# Altium PCB display.PcbDoc (part 2 of 2)
Units mil, origin at the board's own origin, x right, y up, seen from the top; angles counter-clockwise.
Board outline 6000 x 4000 mil, 2 copper layers (Top Layer, Bottom Layer); 69 components, 74 nets, 310 pads, 139 vias.
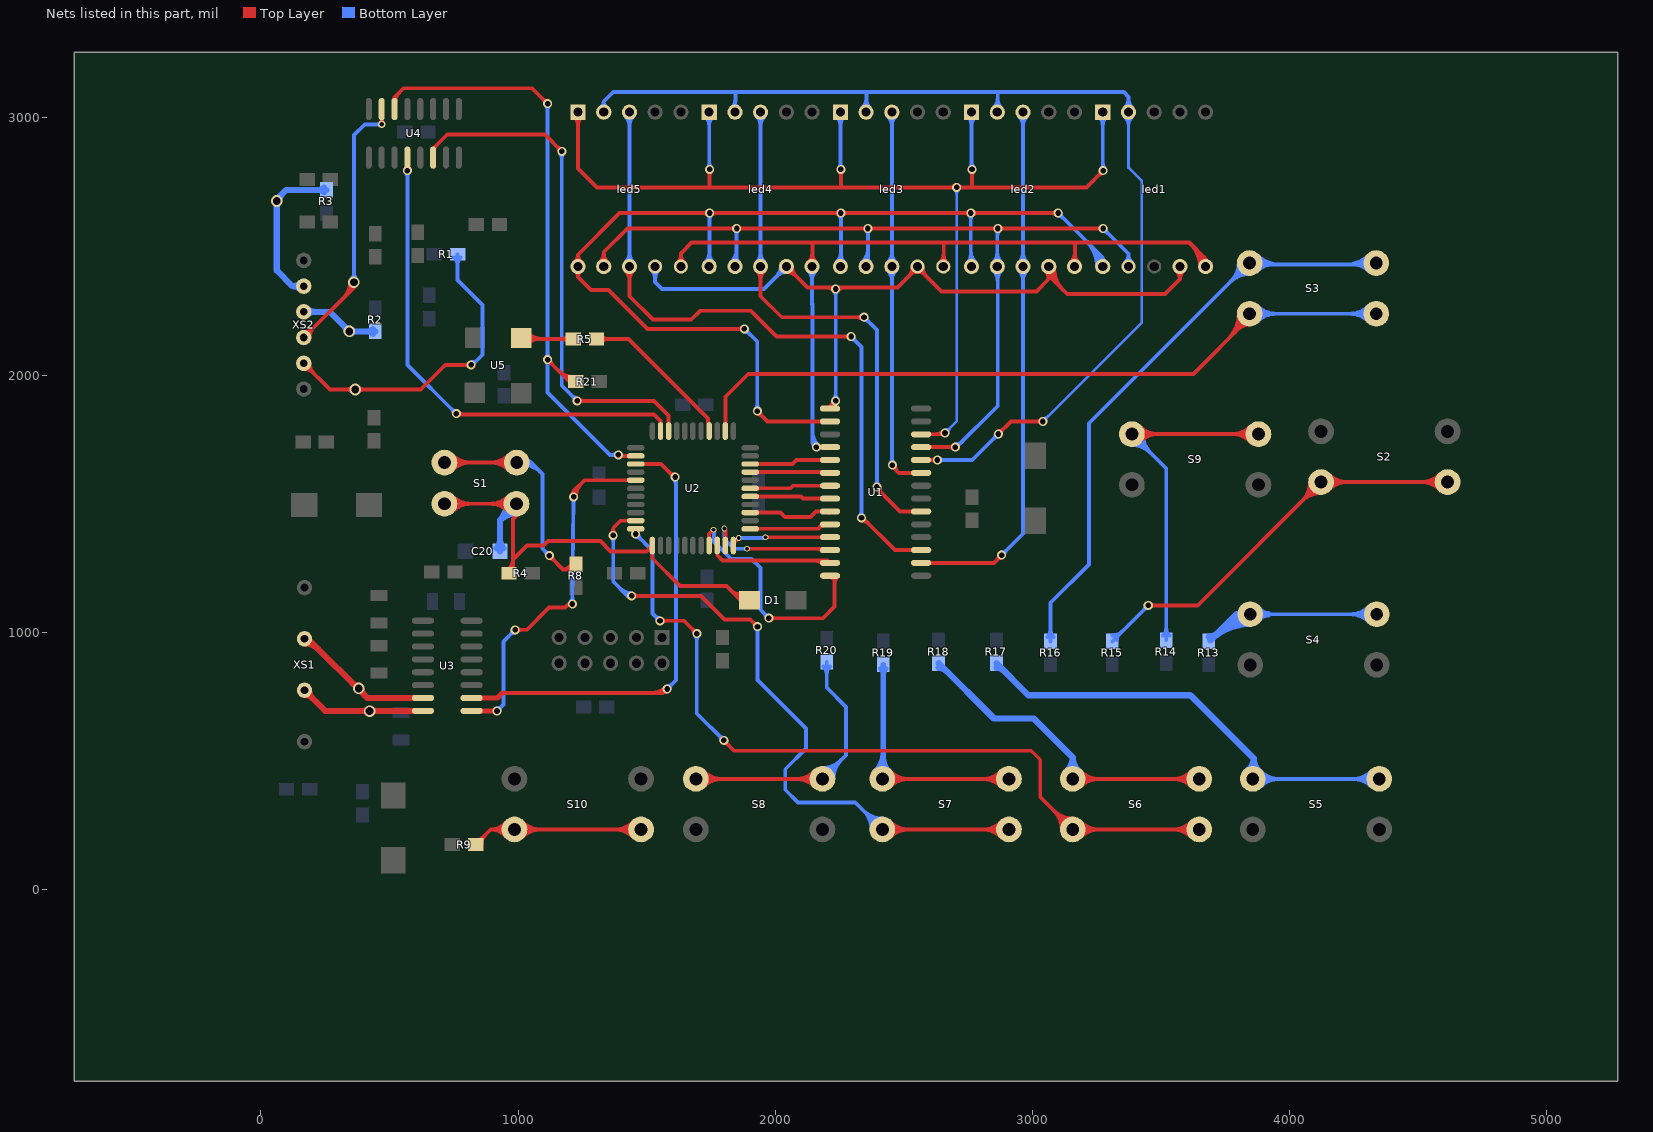
[diagram p2: the nets of this part, all layers, seen from the top]

## Via types
v1: diameter 35, hole 22, Top Layer to Bottom Layer, 110 vias
v2: diameter 22, hole 15, Top Layer to Bottom Layer, 9 vias
v3: diameter 50, hole 28, Top Layer to Bottom Layer, 8 vias
v4: diameter 45, hole 30, Top Layer to Bottom Layer, 6 vias
v5: diameter 157.48, hole 137.8, Top Layer to Bottom Layer, 4 vias
v6: diameter 28, hole 15, Top Layer to Bottom Layer, 1 vias
v7: diameter 30, hole 18, Top Layer to Bottom Layer, 1 vias

## Nets (pads, with @x,y where several pads share a name; then routed paths per layer and width w, separated by ;. In a path a pad name is that pad's centre, name@x,y a point inside that pad or via, vN(x,y) a via of type N, cw(c..) or ccw(c..) an arc to the next point about the centre after c; other vN are vias at no path point) (continued)
Netled1_c: led1.c led2.c led3.c led4.c led5.c U1.1 | length 3971.9
  Top Layer w15: led4.c@2043.15,2400.14 cw(c2043.15,2346.96) 2080.75,2384.56 cw(c2118.36,2422.17) led4.c@2065.18,2422.17 ; led4.c@2043.15,2422.17 2125.32,2340 2475,2340 led3.c@2553.15,2418.15 ; 2198.79,2340 cw(c2198.79,2298.79) v1@2227.93,2327.93 ; U1.1@2212.83,1870 2212.83,1877.83 v1(2235,1900) ; v1@2225,1900 cw(c2200.86,1900) 2217.93,1882.93 cw(c2235,1865.86) v1@2235,1890 ; v1(2235,2335) v1@2235,2340 ; v1@2242.07,2327.93 cw(c2271.21,2298.79) 2271.21,2340 ; 2516.17,2381.17 ccw(c2475.17,2422.17) led3.c@2533.15,2422.17 ; 2525.86,2390.86 cw(c2553.15,2363.58) 2553.15,2402.17 cw(c2553.15,2363.58) 2580.44,2390.86 ; led3.c@2553.15,2422.17 led3.c@2553.15,2418.15 ; led3.c@2573.15,2422.17 ccw(c2631.13,2422.17) 2590.13,2381.17 ; led2.c@3048.52,2405.69 cw(c3019.63,2373.15) 3063.15,2373.15 ; led2.c@3055.2,2422.81 ccw(c3111.22,2418.26) 3071.48,2378.52 ; led2.c@3070.15,2421.6 ccw(c3153.63,2414.81) 3094.41,2355.59 ; led2.c@3077.77,2405.69 ccw(c3106.67,2373.15) 3063.15,2373.15 ; led2.c@3085.1,2420.38 ccw(c3196.05,2411.37) 3117.34,2332.66 ; led1.c@3558.52,2405.69 cw(c3529.63,2373.15) 3573.15,2373.15 ; led1.c@3573.15,2422.17 3573.15,2373.15 ; led1.c@3587.77,2405.69 ccw(c3616.67,2373.15) 3573.15,2373.15 ; led3.c@2553.15,2418.15 2646.3,2325 3015,2325 3063.15,2373.15 ; 3063.15,2373.15 led2.c@3063.15,2422.17 3063.15,2386.85 ; 3063.15,2386.85 cw(c3080.44,2386.85) 3072.84,2402.38 ccw(c3080.44,2386.85) 3063.15,2386.85 ; 3063.15,2386.85 ccw(c3045.86,2386.85) 3053.46,2402.38 cw(c3045.86,2386.85) 3063.15,2386.85 ; 3063.15,2386.85 3135,2315 3515,2315 3573.15,2373.15
  Bottom Layer w15: led5.c@1519.01,2408.02 cw(c1484.87,2373.88) 1533.15,2373.88 cw(c1581.43,2373.88) led5.c@1547.29,2408.02 ; led5.c@1533.15,2422.17 1533.15,2361.85 1560,2335 1955.98,2335 led4.c@2043.15,2422.17 ; led4.c@2021.12,2422.17 cw(c1967.94,2422.17) 2005.55,2384.56 cw(c2043.15,2346.96) led4.c@2043.15,2400.14 ; v1@2227.93,1907.07 ccw(c2210.86,1924.14) 2235,1924.14 ccw(c2259.14,1924.14) v1@2242.07,1907.07 ; v1@2227.93,2327.93 cw(c2210.86,2310.86) 2235,2310.86 cw(c2259.14,2310.86) v1@2242.07,2327.93 ; v1(2235,1900) v1(2235,2335) ; led3.c@2553.15,2408.15 led3.c@2553.15,2422.17
Netled1_d: led1.d led2.d led3.d led4.d led5.d U1.25 | length 4621.8
  Top Layer w15: led5.d@1317.57,2437.74 ccw(c1279.97,2475.34) 1333.15,2475.34 ccw(c1386.33,2475.34) led5.d@1348.73,2437.74 ; led5.d@1333.15,2422.17 1333.15,2478.15 1425,2570 v1(1850,2570) v1(2360,2570) v1(2865,2570) v1(3275,2570) ; v1@1842.93,2562.93 ccw(c1825.86,2545.86) 1825.86,2570 ccw(c1825.86,2594.14) v1@1842.93,2577.07 ; v1@1857.07,2562.93 cw(c1874.14,2545.86) 1874.14,2570 cw(c1874.14,2594.14) v1@1857.07,2577.07 ; v1@2352.93,2562.93 ccw(c2335.86,2545.86) 2335.86,2570 ccw(c2335.86,2594.14) v1@2352.93,2577.07 ; v1@2367.07,2562.93 cw(c2384.14,2545.86) 2384.14,2570 cw(c2384.14,2594.14) v1@2367.07,2577.07 ; U1.25@2567.17,1720 v1(2700,1720) ; v1@2692.93,1712.93 ccw(c2675.86,1695.86) 2675.86,1720 ccw(c2675.86,1744.14) v1@2692.93,1727.07 ; v1@2857.93,2562.93 ccw(c2840.86,2545.86) 2840.86,2570 ccw(c2840.86,2594.14) v1@2857.93,2577.07 ; v1@2872.07,2562.93 cw(c2889.14,2545.86) 2889.14,2570 cw(c2889.14,2594.14) v1@2872.07,2577.07 ; v1@3267.93,2562.93 ccw(c3250.86,2545.86) 3250.86,2570 ccw(c3250.86,2594.14) v1@3267.93,2577.07
  Bottom Layer w15: led4.d@1827.57,2437.74 ccw(c1773.43,2491.88) 1850,2491.88 ; led4.d@1838.18,2427.13 ccw(c1809.65,2455.67) 1850,2455.67 ; v1@1842.93,2562.93 cw(c1825.86,2545.86) 1850,2545.86 cw(c1874.14,2545.86) v1@1857.07,2562.93 ; led4.d@1843.15,2422.17 1850,2429.02 v1(1850,2570) ; 1850,2458.81 ccw(c1879.79,2458.81) led4.d@1858.73,2437.74 ; led3.d@2337.57,2437.74 ccw(c2283.43,2491.88) 2360,2491.88 ; led3.d@2348.18,2427.13 ccw(c2319.65,2455.67) 2360,2455.67 ; v1@2352.93,2562.93 cw(c2335.86,2545.86) 2360,2545.86 cw(c2384.14,2545.86) v1@2367.07,2562.93 ; led3.d@2353.15,2422.17 2360,2429.02 v1(2360,2570) ; 2360,2458.81 ccw(c2389.79,2458.81) led3.d@2368.73,2437.74 ; v1(2700,1720) 2705,1720 2865,1880 2865,2420.31 led2.d@2863.15,2422.17 2863.15,2568.15 v1(2865,2570) ; v1@2700,1730 ccw(c2700,1766.21) 2725.61,1740.61 ; led2.d@2847.57,2406.59 cw(c2805.5,2364.52) 2865,2364.52 ; led2.d@2847.57,2437.74 ccw(c2809.97,2475.34) 2863.15,2475.34 ccw(c2916.33,2475.34) led2.d@2878.73,2437.74 ; v1@2857.93,2562.93 cw(c2845.33,2550.33) 2863.15,2550.33 ; 2863.15,2541.39 cw(c2893.61,2541.39) v1@2872.07,2562.93 ; 2865,2373.45 cw(c2911.86,2373.45) led2.d@2878.73,2406.59 ; v1@3275,2560 cw(c3275,2535.86) 3292.07,2552.93 cw(c3309.14,2570) v1@3285,2570 ; v1(3275,2570) 3373.15,2471.85 led1.d@3373.15,2422.17 ; led1.d@3359.01,2436.31 ccw(c3324.87,2470.45) 3373.15,2470.45 ccw(c3421.43,2470.45) led1.d@3387.29,2436.31
Netled1_DP: led1.DP led2.DP led3.DP led4.DP led5.DP U1.4 | length 3945.9
  Top Layer w15: led5.DP@1619.01,2436.31 ccw(c1584.87,2470.45) 1633.15,2470.45 ccw(c1681.43,2470.45) led5.DP@1647.29,2436.31 ; led5.DP@1633.15,2422.17 1633.15,2473.15 1675,2515 2145,2515 ; led4.DP@2127.57,2437.74 ccw(c2085.5,2479.81) 2145,2479.81 ; led4.DP@2143.15,2422.17 2145,2424.02 2145,2515 ; 2145,2470.88 ccw(c2191.86,2470.88) led4.DP@2158.73,2437.74 ; v1(2160,1720) U1.4@2212.83,1720 ; v1@2167.07,1712.93 cw(c2184.14,1695.86) 2184.14,1720 cw(c2184.14,1744.14) v1@2167.07,1727.07 ; led3.DP@2639.01,2436.31 ccw(c2600.4,2474.92) 2655,2474.92 ; led3.DP@2653.15,2422.17 2655,2424.02 2655,2515 ; 2655,2465.98 ccw(c2696.97,2465.98) led3.DP@2667.29,2436.31 ; led2.DP@3147.57,2437.74 ccw(c3105.5,2479.81) 3165,2479.81 ; led2.DP@3163.15,2422.17 3165,2424.02 3165,2515 ; 3165,2470.88 ccw(c3211.86,2470.88) led2.DP@3178.73,2437.74 ; 3614.56,2510.44 cw(c3526.28,2422.17) led1.DP@3651.12,2422.17 ; 3640.16,2484.84 cw(c3577.49,2422.17) led1.DP@3666.12,2422.17 ; 3665.77,2459.23 cw(c3628.7,2422.17) led1.DP@3681.12,2422.17 ; led1.DP@3673.15,2422.17 3673.15,2451.85 3610,2515 3165,2515 ; 2145,2515 2655,2515 ; 2655,2515 3165,2515
  Bottom Layer w15: led4.DP@2127.57,2406.59 cw(c2089.97,2368.99) 2143.15,2368.99 cw(c2196.33,2368.99) led4.DP@2158.73,2406.59 ; led4.DP@2143.15,2422.17 2143.15,2276.85 2145,2275 2145,1735 v1(2160,1720) ; 2145,1744.14 ccw(c2184.14,1744.14) v1@2156.46,1716.46 ; 2145,1780.36 ccw(c2220.36,1780.36) v1@2167.07,1727.07
Netled1_e: led1.e led2.e led3.e led4.e led5.e U1.2 | length 5518.1
  Top Layer w15: led5.e@1219.35,2439.33 ccw(c1196.17,2468.15) 1233.15,2468.15 ; led5.e@1221.25,2403.63 cw(c1207.27,2381.85) 1233.15,2381.85 ; led5.e@1245.05,2403.63 ccw(c1259.03,2381.85) 1233.15,2381.85 ; led5.e@1246.95,2439.33 cw(c1270.13,2468.15) 1233.15,2468.15 ; v1@1737.93,2622.93 ccw(c1720.86,2605.86) 1720.86,2630 ccw(c1720.86,2654.14) v1@1737.93,2637.07 ; v1@1752.07,2622.93 cw(c1769.14,2605.86) 1769.14,2630 cw(c1769.14,2654.14) v1@1752.07,2637.07 ; v1@1872.93,2172.93 ccw(c1855.86,2155.86) 1855.86,2180 ccw(c1855.86,2204.14) v1@1872.93,2187.07 ; v1(1880,2180) 1503,2180 1351.61,2331.39 1283.61,2331.39 1233.15,2381.85 ; v1@1930,1850 cw(c1930,1825.86) 1947.07,1842.93 cw(c1964.14,1860) v1@1940,1860 ; v1(1930,1860) 1970,1820 2085,1820 ; 2075,1820 2085,1820 ; U1.2@2212.83,1820 2085,1820 ; v1@2247.93,2622.93 ccw(c2230.86,2605.86) 2230.86,2630 ccw(c2230.86,2654.14) v1@2247.93,2637.07 ; v1@2262.07,2622.93 cw(c2279.14,2605.86) 2279.14,2630 cw(c2279.14,2654.14) v1@2262.07,2637.07 ; v1@2752.93,2622.93 ccw(c2735.86,2605.86) 2735.86,2630 ccw(c2735.86,2654.14) v1@2752.93,2637.07 ; v1@2767.07,2622.93 cw(c2784.14,2605.86) 2784.14,2630 cw(c2784.14,2654.14) v1@2767.07,2637.07 ; v1@3092.93,2622.93 ccw(c3075.86,2605.86) 3075.86,2630 ccw(c3075.86,2654.14) v1@3092.93,2637.07 ; v1(3100,2630) v1(2760,2630) v1(2255,2630) v1(1745,2630) 1395,2630 1233.15,2468.15 ; 1233.15,2381.85 led5.e@1233.15,2422.17 1233.15,2468.15
  Bottom Layer w15: led4.e@1727.57,2437.74 ccw(c1685.5,2479.81) 1745,2479.81 ; v1@1737.93,2622.93 cw(c1720.86,2605.86) 1745,2605.86 cw(c1769.14,2605.86) v1@1752.07,2622.93 ; led4.e@1743.15,2422.17 1745,2424.02 v1(1745,2630) ; 1745,2470.88 ccw(c1791.86,2470.88) led4.e@1758.73,2437.74 ; v1@1880,2170 cw(c1880,2145.86) 1897.07,2162.93 cw(c1914.14,2180) v1@1890,2180 ; v1(1880,2180) 1930,2130 v1(1930,1860) ; v1@1922.93,1867.07 ccw(c1905.86,1884.14) 1930,1884.14 ccw(c1954.14,1884.14) v1@1937.07,1867.07 ; led3.e@2237.57,2437.74 ccw(c2195.5,2479.81) 2255,2479.81 ; v1@2247.93,2622.93 cw(c2230.86,2605.86) 2255,2605.86 cw(c2279.14,2605.86) v1@2262.07,2622.93 ; led3.e@2253.15,2422.17 2255,2424.02 v1(2255,2630) ; 2255,2470.88 ccw(c2301.86,2470.88) led3.e@2268.73,2437.74 ; led2.e@2747.57,2437.74 ccw(c2717.57,2467.74) 2760,2467.74 ; v1@2752.93,2622.93 cw(c2735.86,2605.86) 2760,2605.86 cw(c2784.14,2605.86) v1@2767.07,2622.93 ; 2760,2482.95 ccw(c2823.93,2482.95) led2.e@2778.73,2437.74 ; v1(2760,2630) 2760,2425.31 led2.e@2763.15,2422.17 ; v1@3100,2620 cw(c3100,2595.86) 3117.07,2612.93 cw(c3134.14,2630) v1@3110,2630 ; v1(3100,2630) 3273.15,2456.85 ; 3211.02,2518.98 cw(c3114.21,2422.17) led1.e@3251.12,2422.17 ; 3236.63,2493.37 cw(c3165.42,2422.17) led1.e@3266.12,2422.17 ; 3262.23,2467.77 cw(c3216.63,2422.17) led1.e@3281.12,2422.17 ; led1.e@3263.78,2442.1 ccw(c3256.86,2456.85) 3273.15,2456.85 ; led1.e@3273.15,2422.17 3273.15,2456.85 ; led1.e@3282.51,2442.1 cw(c3289.44,2456.85) 3273.15,2456.85
Netled1_f: led1.f led2.f led3.f led4.f led5.f U1.24 | length 5060
  Top Layer w15: U1.24@2567.17,1670 v1(2630,1670) ; v1@2622.93,1662.93 ccw(c2605.86,1645.86) 2605.86,1670 ccw(c2605.86,1694.14) v1@2622.93,1677.07 ; v1(2867,1771) 2916,1820 v1(3040,1820) ; v1@2867,1781 ccw(c2867,1805.14) 2884.07,1788.07 ccw(c2901.14,1771) v1@2877,1771 ; v1@3032.93,1812.93 ccw(c3015.86,1795.86) 3015.86,1820 ccw(c3015.86,1844.14) v1@3032.93,1827.07
  Bottom Layer w10: v1(3040,1820) 3425,2205 3425,2755 3373.15,2806.85 led1.f@3373.15,3022.17 ; v1@3040,1832.5 ccw(c3040,1862.68) 3061.34,1841.34 ccw(c3082.68,1820) v1@3052.5,1820 ; led1.f@3355.81,3004.82 cw(c3313.94,2962.95) 3373.15,2962.95 cw(c3432.36,2962.95) led1.f@3390.49,3004.82 ; led1.f@3362.88,3011.89 cw(c3338.08,2987.09) 3373.15,2987.09 cw(c3408.22,2987.09) led1.f@3383.42,3011.89
  Bottom Layer w15: led5.f@1321,3040.54 ccw(c1306.04,3063.15) 1333.15,3063.15 ; led5.f@1333.15,3022.17 1333.15,3063.15 ; led5.f@1345.3,3040.54 cw(c1360.26,3063.15) 1333.15,3063.15 ; led4.f@1831,3040.54 ccw(c1816.04,3063.15) 1843.15,3063.15 ; led4.f@1843.15,3022.17 1843.15,3063.15 ; led4.f@1855.3,3040.54 cw(c1870.26,3063.15) 1843.15,3063.15 ; led3.f@2337.57,3037.74 ccw(c2295.5,3079.81) 2355,3079.81 ; led3.f@2353.15,3022.17 2355,3024.02 2355,3100 ; 2355,3070.88 ccw(c2401.86,3070.88) led3.f@2368.73,3037.74 ; v1(2630,1670) 2766,1670 v1(2867,1771) ; v1@2637.07,1662.93 cw(c2654.14,1645.86) 2654.14,1670 cw(c2654.14,1694.14) v1@2637.07,1677.07 ; led2.f@2847.57,3037.74 ccw(c2805.5,3079.81) 2865,3079.81 ; v1@2857,1771 cw(c2832.86,1771) 2849.93,1753.93 cw(c2867,1736.86) v1@2867,1761 ; led2.f@2863.15,3022.17 2865,3024.02 2865,3100 ; 2865,3070.88 ccw(c2911.86,3070.88) led2.f@2878.73,3037.74 ; led1.f@3357.57,3037.74 ccw(c3319.97,3075.34) 3373.15,3075.34 ccw(c3426.33,3075.34) led1.f@3388.73,3037.74 ; led1.f@3373.15,3022.17 3373.15,3081.85 3355,3100 2865,3100 ; 1333.15,3063.15 1370,3100 1845,3100 ; 1843.15,3063.15 1845,3065 1845,3100 ; 1845,3100 2355,3100 ; 2355,3100 2865,3100
Netled1_g: led1.g led2.g led3.g led4.g led5.g U1.26 | length 5423
  Top Layer w15: led5.g@1217.57,3006.59 cw(c1179.97,2968.99) 1233.15,2968.99 cw(c1286.33,2968.99) led5.g@1248.73,3006.59 ; led5.g@1233.15,3022.17 1233.15,2803.15 1306.3,2730 1745,2730 ; v1@1737.93,2792.93 cw(c1720.86,2775.86) 1745,2775.86 cw(c1769.14,2775.86) v1@1752.07,2792.93 ; v1(1745,2800) 1745,2730 ; v1@2247.93,2792.93 cw(c2230.86,2775.86) 2255,2775.86 cw(c2279.14,2775.86) v1@2262.07,2792.93 ; v1(2255,2800) 2255,2730 ; U1.26@2567.17,1770 2655,1770 v1(2660,1775) ; 2623.79,1770 ccw(c2623.79,1811.21) v1@2652.93,1782.07 ; v1@2697.93,2722.93 ccw(c2680.86,2705.86) 2680.86,2730 ccw(c2680.86,2754.14) v1@2697.93,2737.07 ; v1@2712.07,2722.93 cw(c2729.14,2705.86) 2729.14,2730 cw(c2729.14,2754.14) v1@2712.07,2737.07 ; v1@2757.93,2792.93 cw(c2740.86,2775.86) 2765,2775.86 cw(c2789.14,2775.86) v1@2772.07,2792.93 ; v1(2765,2800) 2765,2730 ; v1@3265,2795 cw(c3240.86,2795) 3257.93,2777.93 cw(c3275,2760.86) v1@3275,2785 ; v1(3275,2795) 3210,2730 2765,2730 ; 1745,2730 2255,2730 ; 2255,2730 v1(2705,2730) 2765,2730
  Bottom Layer w10: v1(2660,1775) 2705,1820 v1(2705,2730) ; v1@2660,1787.5 ccw(c2660,1817.68) 2681.34,1796.34 ccw(c2702.68,1775) v1@2672.5,1775 ; v1@2696.16,2721.16 cw(c2674.82,2699.82) 2705,2699.82 cw(c2735.18,2699.82) v1@2713.84,2721.16
  Bottom Layer w15: led4.g@1727.57,3006.59 cw(c1689.97,2968.99) 1743.15,2968.99 cw(c1796.33,2968.99) led4.g@1758.73,3006.59 ; v1@1737.93,2807.07 ccw(c1725.33,2819.67) 1743.15,2819.67 ; 1743.15,2828.61 ccw(c1773.61,2828.61) v1@1752.07,2807.07 ; led4.g@1743.15,3022.17 1743.15,2801.85 v1(1745,2800) ; led3.g@2237.57,3006.59 cw(c2199.97,2968.99) 2253.15,2968.99 cw(c2306.33,2968.99) led3.g@2268.73,3006.59 ; v1@2247.93,2807.07 ccw(c2235.33,2819.67) 2253.15,2819.67 ; 2253.15,2828.61 ccw(c2283.61,2828.61) v1@2262.07,2807.07 ; led3.g@2253.15,3022.17 2253.15,2801.85 v1(2255,2800) ; led2.g@2747.57,3006.59 cw(c2709.97,2968.99) 2763.15,2968.99 cw(c2816.33,2968.99) led2.g@2778.73,3006.59 ; v1@2757.93,2807.07 ccw(c2745.33,2819.67) 2763.15,2819.67 ; v1@2760,2795 2763.15,2798.15 led2.g@2763.15,3022.17 ; 2763.15,2828.61 ccw(c2793.61,2828.61) v1@2772.07,2807.07 ; led1.g@3257.57,3006.59 cw(c3219.97,2968.99) 3273.15,2968.99 cw(c3326.33,2968.99) led1.g@3288.73,3006.59 ; v1@3267.93,2802.07 ccw(c3255.33,2814.67) 3273.15,2814.67 ; 3273.15,2823.61 ccw(c3303.61,2823.61) v1@3282.07,2802.07 ; led1.g@3273.15,3022.17 3273.15,2796.85 v1(3275,2795)
Netled2_AT: led2.AT U1.16 | length 2408.3
  Top Layer w15: U1.16@2567.17,1270 2850,1270 v1(2880,1300) ; v1@2870,1300 cw(c2845.86,1300) 2862.93,1282.93 cw(c2880,1265.86) v1@2880,1290
  Bottom Layer w15: v1(2880,1300) 2963.15,1383.15 led2.AT@2963.15,2422.17 led2.AT@2963.15,3022.17 ; v1@2880,1310 ccw(c2880,1334.14) 2897.07,1317.07 ccw(c2914.14,1300) v1@2890,1300 ; led2.AT@2947.57,2406.59 cw(c2909.97,2368.99) 2963.15,2368.99 cw(c3016.33,2368.99) led2.AT@2978.73,2406.59 ; led2.AT@2947.57,2437.74 ccw(c2909.97,2475.34) 2963.15,2475.34 ccw(c3016.33,2475.34) led2.AT@2978.73,2437.74 ; led2.AT@2947.57,3006.59 cw(c2909.97,2968.99) 2963.15,2968.99 cw(c3016.33,2968.99) led2.AT@2978.73,3006.59
Netled3_AT: led3.AT U1.23 | length 1815
  Top Layer w15: v1@2453.15,1646.85 2480,1620 U1.23@2567.17,1620 ; v1@2465,1650 ccw(c2501.21,1650) 2475.61,1624.39
  Bottom Layer w15: led3.AT@2437.57,2406.59 cw(c2399.97,2368.99) 2453.15,2368.99 cw(c2506.33,2368.99) led3.AT@2468.73,2406.59 ; led3.AT@2437.57,2437.74 ccw(c2399.97,2475.34) 2453.15,2475.34 ccw(c2506.33,2475.34) led3.AT@2468.73,2437.74 ; led3.AT@2437.57,3006.59 cw(c2399.97,2968.99) 2453.15,2968.99 cw(c2506.33,2968.99) led3.AT@2468.73,3006.59 ; v1@2447.93,1657.07 ccw(c2435.33,1669.67) 2453.15,1669.67 ; 2453.15,1678.61 ccw(c2483.61,1678.61) v1@2462.07,1657.07 ; led3.AT@2453.15,3022.17 led3.AT@2453.15,2422.17 2453.15,1651.85 v1(2455,1650)
Netled4_AT: led4.AT U1.20 | length 2439
  Top Layer w15: led4.AT@1927.57,2406.59 cw(c1889.97,2368.99) 1943.15,2368.99 cw(c1996.33,2368.99) led4.AT@1958.73,2406.59 ; led4.AT@1943.15,2422.17 1943.15,2306.85 2025,2225 v1(2345,2225) ; v1@2337.93,2217.93 ccw(c2320.86,2200.86) 2320.86,2225 ccw(c2320.86,2249.14) v1@2337.93,2232.07 ; v1(2395,1565) 2405,1555 2405,1550 2485,1470 U1.20@2567.17,1470 ; v1@2405,1565 ccw(c2441.21,1565) 2415.61,1539.39
  Bottom Layer w15: led4.AT@1927.57,2437.74 ccw(c1889.97,2475.34) 1943.15,2475.34 ccw(c1996.33,2475.34) led4.AT@1958.73,2437.74 ; led4.AT@1927.57,3006.59 cw(c1889.97,2968.99) 1943.15,2968.99 cw(c1996.33,2968.99) led4.AT@1958.73,3006.59 ; led4.AT@1943.15,2422.17 led4.AT@1943.15,3022.17 ; v1@2345,2215 cw(c2345,2190.86) 2362.07,2207.93 cw(c2379.14,2225) v1@2355,2225 ; v1(2345,2225) 2395,2175 v1(2395,1565) ; v1@2387.93,1572.07 ccw(c2370.86,1589.14) 2395,1589.14 ccw(c2419.14,1589.14) v1@2402.07,1572.07
Netled5_AT: led5.AT U1.17 | length 3063.6
  Top Layer w15: led5.AT@1417.57,2406.59 cw(c1379.97,2368.99) 1433.15,2368.99 cw(c1486.33,2368.99) led5.AT@1448.73,2406.59 ; led5.AT@1433.15,2422.17 1433.15,2306.85 1524,2216 1673.5,2216 1707.5,2250 1905,2250 2005,2150 v1(2295,2150) ; v1@2287.93,2142.93 ccw(c2270.86,2125.86) 2270.86,2150 ccw(c2270.86,2174.14) v1@2287.93,2157.07 ; v1@2335,1435 cw(c2335,1398.79) 2360.61,1424.39 ; v1@2340,1445 2465,1320 U1.17@2567.17,1320
  Bottom Layer w15: led5.AT@1417.57,2437.74 ccw(c1379.97,2475.34) 1433.15,2475.34 ccw(c1486.33,2475.34) led5.AT@1448.73,2437.74 ; led5.AT@1417.57,3006.59 cw(c1379.97,2968.99) 1433.15,2968.99 cw(c1486.33,2968.99) led5.AT@1448.73,3006.59 ; led5.AT@1433.15,2422.17 led5.AT@1433.15,3022.17 ; v1@2295,2140 cw(c2295,2115.86) 2312.07,2132.93 cw(c2329.14,2150) v1@2305,2150 ; v1(2295,2150) 2335,2110 v1(2335,1445) ; v1@2327.93,1452.07 ccw(c2310.86,1469.14) 2335,1469.14 ccw(c2359.14,1469.14) v1@2342.07,1452.07
NetR1_2: R1.2 XS2.2 | length 1570.7
  Top Layer w15: XS2.2@167,2023.5 cw(c167,1969.18) 205.41,2007.59 cw(c243.82,2046) XS2.2@189.5,2046 ; XS2.2@167,2046 XS2.2@171,2042 ; XS2.2@179,2034 XS2.2@171,2042 ; v4@356.39,1933.39 ccw(c330.79,1907.79) 330.79,1944 ccw(c330.79,1980.21) v4@356.39,1954.61 ; v4@377.61,1933.39 cw(c403.21,1907.79) 403.21,1944 cw(c403.21,1980.21) v4@377.61,1954.61 ; 791.44,2039 ccw(c791.44,2066.56) v1@810.93,2047.07 ; 796.27,2039 cw(c796.27,2018.27) v1@810.93,2032.93 ; v1@812,2034 v1@817,2039 ; v1(818,2040) v1@817,2039 ; XS2.2@171,2042 269,1944 622,1944 717,2039 v1@817,2039
  Bottom Layer w15: R1.2@752.63,2457.63 cw(c722.75,2427.75) 765,2427.75 cw(c807.25,2427.75) R1.2@777.37,2457.63 ; R1.2@765,2469 765,2370 862,2273 862,2079 v1@821.5,2038.5 ; v1@818,2050 ccw(c818,2086.21) 843.61,2060.61
  other v4: 367,1944
NetR2_2: R2.2 XS2.4 | length 509.5
  Bottom Layer w23.62: XS2.4@167,2246 268,2246 v4(344,2170) R2.2@445,2170 ; XS2.4@179.86,2233.14 cw(c210.91,2202.09) 210.91,2246 cw(c210.91,2289.91) XS2.4@179.86,2258.86 ; v4@333.31,2170 ccw(c307.51,2170) 325.75,2188.25 ccw(c344,2206.49) v4@344,2180.69 ; v4@351.56,2162.44 cw(c369.81,2144.19) 369.81,2170 cw(c369.81,2195.81) v4@351.56,2177.56 ; R2.2@435.67,2160.67 ccw(c413.16,2138.16) 413.16,2170 ccw(c413.16,2201.84) R2.2@435.67,2179.33
NetR3_2: R3.2 XS2.5 | length 805.8
  Bottom Layer w23.62: v4@54.44,2669.44 cw(c36.19,2651.19) 62,2651.19 cw(c87.81,2651.19) v4@69.56,2669.44 ; v4@72.69,2677 cw(c112.98,2677) 84.49,2705.49 ; XS2.5@154.14,2333.14 ccw(c123.09,2302.09) 123.09,2346 ccw(c123.09,2389.91) XS2.5@154.14,2358.86 ; XS2.5@167,2346 123,2346 62,2407 62,2683 99,2720 R3.2@255,2720 ; R3.2@245.67,2710.67 ccw(c223.16,2688.16) 223.16,2720 ccw(c223.16,2751.84) R3.2@245.67,2729.33
  other v4: 62,2677
NetR5_1: R5.1 U2.37 | length 704.1
  Top Layer w15: R5.1@1305,2140 1430,2140 1738,1832 1738,1817 1742.99,1812.01 U2.37@1742.99,1782.44 U2.37@1742.99,1808.01 ; R5.1@1322.37,2127.63 cw(c1352.25,2097.75) 1352.25,2140 cw(c1352.25,2182.25) R5.1@1322.37,2152.37
NetR5_2: R5.2 U5.3 | length 433.6
  Top Layer w15: U5.3@1013,2144 1017,2140 R5.2@1215,2140 ; U5.3@1024.93,2155.93 ccw(c1063.38,2194.38) 1063.38,2140 ; U5.3@1035.54,2121.46 cw(c1080.28,2076.72) 1080.28,2140 ; U5.3@1035.54,2166.54 ccw(c1099.6,2230.6) 1099.6,2140 ; R5.2@1197.63,2127.63 ccw(c1167.75,2097.75) 1167.75,2140 ccw(c1167.75,2182.25) R5.2@1197.63,2152.37
NetR8_1: R8.1 S1.2 | length 1821
  Top Layer w15: S1.2@714,1660 S1.2@995,1660 ; S1.2@733.45,1640.55 cw(c780.39,1593.61) 780.39,1660 cw(c780.39,1726.39) S1.2@733.45,1679.45 ; S1.2@744.05,1629.95 cw(c816.6,1557.4) 816.6,1660 cw(c816.6,1762.6) S1.2@744.05,1690.05 ; S1.2@964.95,1629.95 ccw(c892.4,1557.4) 892.4,1660 ccw(c892.4,1762.6) S1.2@964.95,1690.05 ; S1.2@975.55,1640.55 ccw(c928.61,1593.61) 928.61,1660 ccw(c928.61,1726.39) S1.2@975.55,1679.45 ; v1@1121.9,1288.1 cw(c1121.9,1263.96) 1138.97,1281.03 cw(c1156.04,1298.1) v1@1131.9,1298.1 ; v1@1123.46,1296.54 1175,1245 ; 1198.08,1245 ccw(c1198.08,1271.96) R8.1@1222.72,1261.01 ; R8.1@1209.01,1267.1 cw(c1175,1282.21) 1175,1245 ; R8.1@1240,1245 1175,1245
  Bottom Layer w15: S1.2@990.52,1676.92 cw(c1006.01,1618.45) 1048.78,1661.22 ; S1.2@994.36,1662.42 cw(c1013.73,1589.32) 1067.21,1642.79 ; S1.2@995,1660 1050,1660 ; S1.2@998.2,1647.92 cw(c1021.46,1560.18) 1085.64,1624.36 ; S1.2@1036.13,1649.28 cw(c1050,1645.66) 1050,1660 ; S1.2@1036.13,1670.72 ccw(c1050,1674.34) 1050,1660 ; v1@1111.9,1298.1 ccw(c1087.75,1298.1) 1104.83,1315.17 ccw(c1121.9,1332.25) v1@1121.9,1308.1 ; v1(1121.9,1298.1) 1095,1325 1095,1615 1050,1660
NetR9_2: R9.2 S10.1 | length 1490.4
  Top Layer w15: R9.2@835,175 893.74,233.74 ; R9.2@840,192.5 ccw(c840,222.68) 861.34,201.34 ; R9.2@857.5,175 cw(c911.82,175) 873.41,213.41 ; S10.1@954.02,206.05 ccw(c893.75,154.3) 893.75,233.74 ; S10.1@954.02,261.43 cw(c893.75,313.18) 893.75,233.74 ; S10.1@965.4,215.82 ccw(c926.4,182.34) 926.4,233.74 ccw(c926.4,285.14) S10.1@965.4,251.66 ; S10.1@1005.71,214.29 cw(c1052.65,167.35) 1052.65,233.74 cw(c1052.65,300.13) S10.1@1005.71,253.19 ; S10.1@1016.31,203.69 cw(c1088.86,131.14) 1088.86,233.74 cw(c1088.86,336.34) S10.1@1016.31,263.79 ; S10.1@1448.33,203.69 ccw(c1375.78,131.14) 1375.78,233.74 ccw(c1375.78,336.34) S10.1@1448.33,263.79 ; S10.1@1458.94,214.29 ccw(c1411.99,167.35) 1411.99,233.74 ccw(c1411.99,300.13) S10.1@1458.94,253.19 ; S10.1@1478.39,233.74 S10.1@986.26,233.74 893.74,233.74
NetR13_1: R13.1 S4.2 | length 1456
  Bottom Layer w15: 3916.26,1070.59 S4.2@4338.26,1070.59 ; S4.2@4308.21,1040.54 ccw(c4235.66,967.99) 4235.66,1070.59 ccw(c4235.66,1173.19) S4.2@4308.21,1100.64 ; S4.2@4318.81,1051.15 ccw(c4271.87,1004.2) 4271.87,1070.59 ccw(c4271.87,1136.98) S4.2@4318.81,1090.04
  Bottom Layer w25: R13.1@3685,982.5 ccw(c3685,1030.57) 3718.99,996.58 ; R13.1@3691.32,968.91 cw(c3846.26,813.98) S4.2@3846.26,1033.09 ; R13.1@3692.7,970.3 3793,1070.59 3916.26,1070.59 ; 3734,1011.59 cw(c3846.26,899.33) S4.2@3846.26,1058.09 ; 3776.68,1054.27 cw(c3846.26,984.69) S4.2@3846.26,1083.09 ; S4.2@3877.48,1049.82 cw(c3916.26,1024.01) 3916.26,1070.59 ; S4.2@3877.48,1091.37 ccw(c3916.26,1117.17) 3916.26,1070.59
NetR14_1: R14.1 S9.2 | length 2210.7
  Top Layer w15: S9.2@3386.26,1770.59 S9.2@3878.26,1770.59 ; S9.2@3405.71,1751.15 cw(c3452.65,1704.2) 3452.65,1770.59 cw(c3452.65,1836.98) S9.2@3405.71,1790.04 ; S9.2@3416.31,1740.54 cw(c3488.86,1667.99) 3488.86,1770.59 cw(c3488.86,1873.19) S9.2@3416.31,1800.64 ; S9.2@3848.21,1740.54 ccw(c3775.66,1667.99) 3775.66,1770.59 ccw(c3775.66,1873.19) S9.2@3848.21,1800.64 ; S9.2@3858.81,1751.15 ccw(c3811.87,1704.2) 3811.87,1770.59 ccw(c3811.87,1836.98) S9.2@3858.81,1790.04
  Bottom Layer w15: S9.2@3386.26,1728.09 cw(c3386.26,1625.49) 3458.81,1698.04 cw(c3531.36,1770.59) S9.2@3428.76,1770.59 ; S9.2@3386.26,1743.09 cw(c3386.26,1676.7) 3433.21,1723.65 cw(c3480.15,1770.59) S9.2@3413.76,1770.59 ; S9.2@3386.26,1770.59 3520,1636.85 R14.1@3520,970 ; R14.1@3507.63,987.37 ccw(c3477.75,1017.25) 3520,1017.25 ccw(c3562.25,1017.25) R14.1@3532.37,987.37
NetR15_1: R15.1 S2.2 | length 2498.9
  Top Layer w15: v1(3450,1105) 3642.33,1105 S2.2@4121.74,1584.41 S2.2@4613.74,1584.41 ; v1@3457.07,1097.93 cw(c3474.14,1080.86) 3474.14,1105 cw(c3474.14,1129.14) v1@3457.07,1112.07 ; S2.2@4079.24,1584.41 cw(c3976.64,1584.41) 4049.19,1511.86 cw(c4121.74,1439.31) S2.2@4121.74,1541.91 ; S2.2@4094.24,1584.41 cw(c4027.85,1584.41) 4074.79,1537.46 cw(c4121.74,1490.52) S2.2@4121.74,1556.91 ; S2.2@4141.19,1564.96 cw(c4188.13,1518.02) 4188.13,1584.41 cw(c4188.13,1650.8) S2.2@4141.19,1603.85 ; S2.2@4151.79,1554.36 cw(c4224.34,1481.81) 4224.34,1584.41 cw(c4224.34,1687.01) S2.2@4151.79,1614.46 ; S2.2@4583.69,1554.36 ccw(c4511.14,1481.81) 4511.14,1584.41 ccw(c4511.14,1687.01) S2.2@4583.69,1614.46 ; S2.2@4594.29,1564.96 ccw(c4547.35,1518.02) 4547.35,1584.41 ccw(c4547.35,1650.8) S2.2@4594.29,1603.85
  Bottom Layer w15: R15.1@3310,965 v1(3450,1105) ; R15.1@3310,987.5 ccw(c3310,1041.82) 3348.41,1003.41 ; R15.1@3327.5,970 cw(c3357.68,970) 3336.34,991.34 ; v1@3440,1105 cw(c3415.86,1105) 3432.93,1087.93 cw(c3450,1070.86) v1@3450,1095
NetR16_1: R16.1 S3.2 | length 3145.5
  Bottom Layer w15: R16.1@3057.63,982.37 ccw(c3027.75,1012.25) 3070,1012.25 ccw(c3112.25,1012.25) R16.1@3082.37,982.37 ; R16.1@3070,965 3070,1115 3219,1264 3219,1813 3836.59,2430.59 S3.2@4336.26,2430.59 ; 3767.15,2361.15 cw(c3844.26,2284.04) S3.2@3844.26,2393.09 ; 3773.6,2367.6 ccw(c3705.6,2435.59) S3.2@3801.76,2435.59 ; 3792.76,2386.76 cw(c3844.26,2335.26) S3.2@3844.26,2408.09 ; 3799.2,2393.2 ccw(c3756.81,2435.59) S3.2@3816.76,2435.59 ; S3.2@3863.71,2416.15 cw(c3898.58,2381.27) 3898.58,2430.59 ; S3.2@3863.71,2455.04 ccw(c3922.72,2514.05) 3922.72,2430.59 ; S3.2@3874.31,2405.54 cw(c3934.79,2345.06) 3934.79,2430.59 ; S3.2@3874.31,2465.64 ccw(c3958.93,2550.27) 3958.93,2430.59 ; 4221.58,2430.59 ccw(c4221.58,2550.27) S3.2@4306.21,2465.64 ; 4245.73,2430.59 cw(c4245.73,2345.06) S3.2@4306.21,2405.54 ; 4257.8,2430.59 ccw(c4257.8,2514.05) S3.2@4316.81,2455.04 ; 4281.94,2430.59 cw(c4281.94,2381.27) S3.2@4316.81,2416.15
NetR17_1: R17.1 S5.2 | length 2388.3
  Bottom Layer w15: S5.2@3860,430.59 S5.2@4336,430.59 ; S5.2@3875.71,411.15 cw(c3922.65,364.2) 3922.65,430.59 cw(c3922.65,496.98) S5.2@3875.71,450.04 ; S5.2@3886.31,400.54 cw(c3958.86,327.99) 3958.86,430.59 cw(c3958.86,533.19) S5.2@3886.31,460.64 ; S5.2@4318.21,400.54 ccw(c4245.66,327.99) 4245.66,430.59 ccw(c4245.66,533.19) S5.2@4318.21,460.64 ; S5.2@4328.81,411.15 ccw(c4281.87,364.2) 4281.87,430.59 ccw(c4281.87,496.98) S5.2@4328.81,450.04
  Bottom Layer w25: R17.1@2860,862.5 cw(c2860,820.25) 2889.87,850.13 ; R17.1@2860,880 2984,756 3614,756 3860,510 ; S5.2@3834.69,461.27 ccw(c3800.43,510) 3860,510 ; S5.2@3860,430.59 3860,510 ; S5.2@3882.28,457.6 cw(c3932.76,510) 3860,510
NetR18_1: R18.1 S6.2 | length 1936.7
  Top Layer w15: S6.2@3156.26,430.59 S6.2@3648.26,430.59 ; S6.2@3175.71,411.15 cw(c3222.65,364.2) 3222.65,430.59 cw(c3222.65,496.98) S6.2@3175.71,450.04 ; S6.2@3186.31,400.54 cw(c3258.86,327.99) 3258.86,430.59 cw(c3258.86,533.19) S6.2@3186.31,460.64 ; S6.2@3618.21,400.54 ccw(c3545.66,327.99) 3545.66,430.59 ccw(c3545.66,533.19) S6.2@3618.21,460.64 ; S6.2@3628.81,411.15 ccw(c3581.87,364.2) 3581.87,430.59 ccw(c3581.87,496.98) S6.2@3628.81,450.04
  Bottom Layer w25: R18.1@2635,862.5 cw(c2635,820.25) 2664.87,850.13 ; R18.1@2635,880 2850,665 3005,665 3156.26,513.74 ; S6.2@3131.44,458.7 ccw(c3082.83,513.74) 3156.26,513.74 ; S6.2@3156.26,430.59 3156.26,513.74 ; S6.2@3181.08,458.7 cw(c3229.69,513.74) 3156.26,513.74
NetR19_1: R19.1 S7.2 | length 1720.1
  Top Layer w15: S7.2@2416.26,430.59 S7.2@2908.26,430.59 ; S7.2@2435.71,411.15 cw(c2482.65,364.2) 2482.65,430.59 cw(c2482.65,496.98) S7.2@2435.71,450.04 ; S7.2@2446.31,400.54 cw(c2518.86,327.99) 2518.86,430.59 cw(c2518.86,533.19) S7.2@2446.31,460.64 ; S7.2@2878.21,400.54 ccw(c2805.66,327.99) 2805.66,430.59 ccw(c2805.66,533.19) S7.2@2878.21,460.64 ; S7.2@2888.81,411.15 ccw(c2841.87,364.2) 2841.87,430.59 ccw(c2841.87,496.98) S7.2@2888.81,450.04
  Bottom Layer w20: S7.2@2387.98,458.87 ccw(c2310.66,536.19) 2420,536.19 ; S7.2@2402.12,444.73 ccw(c2358.95,487.9) 2420,487.9 ; R19.1@2409.39,859.39 cw(c2383.79,833.79) 2420,833.79 cw(c2456.21,833.79) R19.1@2430.61,859.39 ; S7.2@2420,434.33 R19.1@2420,875 ; 2420,518.13 ccw(c2503.8,518.13) S7.2@2444.54,458.87
NetR20_1: R20.1 S8.2 | length 1878.2
  Top Layer w15: S8.2@1691.26,430.59 S8.2@2183.26,430.59 ; S8.2@1710.71,411.15 cw(c1757.65,364.2) 1757.65,430.59 cw(c1757.65,496.98) S8.2@1710.71,450.04 ; S8.2@1721.31,400.54 cw(c1793.86,327.99) 1793.86,430.59 cw(c1793.86,533.19) S8.2@1721.31,460.64 ; S8.2@2153.21,400.54 ccw(c2080.66,327.99) 2080.66,430.59 ccw(c2080.66,533.19) S8.2@2153.21,460.64 ; S8.2@2163.81,411.15 ccw(c2116.87,364.2) 2116.87,430.59 ccw(c2116.87,496.98) S8.2@2163.81,450.04
  Bottom Layer w15: S8.2@2183.26,430.59 2275,522.33 2275,710 2200,785 R20.1@2200,885 ; S8.2@2183.26,458.09 ccw(c2183.26,524.48) 2230.21,477.54 ccw(c2277.15,430.59) S8.2@2210.76,430.59 ; S8.2@2183.26,473.09 ccw(c2183.26,575.69) 2255.81,503.14 ccw(c2328.36,430.59) S8.2@2225.76,430.59 ; R20.1@2187.63,867.63 cw(c2157.75,837.75) 2200,837.75 cw(c2242.25,837.75) R20.1@2212.37,867.63
NetU1_5: U1.5 U2.31 | length 316.8
  Top Layer w15: U2.31@1902.44,1654.49 2013,1654.49 2066.49,1654.49 2082,1670 U1.5@2212.83,1670
NetU1_6: U1.6 U2.30 | length 323.6
  Top Layer w15: U2.30@1902.44,1622.99 U1.6@2209.84,1622.99 ; 2167.64,1622.99 cw(c2167.64,1602.37) U1.6@2182.23,1616.95
NetU1_7: U1.7 U2.28 | length 314.5
  Top Layer w15: U2.28@1902.44,1560 2059,1560 2069,1570 U1.7@2212.83,1570
NetU1_8: U1.8 U2.27 | length 313.9
  Top Layer w15: U2.27@1902.44,1528.5 2099.5,1528.5 2108,1520 U1.8@2212.83,1520
NetU1_9: U1.9 U2.25 | length 323.3
  Top Layer w15: U2.25@1902.44,1465.51 2020.49,1465.51 2037,1449 2137,1449 2158,1470 U1.9@2203.86,1470 ; U1.9@2208.35,1465.51 U1.9@2212.83,1470
NetU1_10: U1.10 U2.23 | length 330.1
  Top Layer w15: U2.23@1902.44,1402.52 2165.52,1402.52 2183,1420 U1.10@2212.83,1420 ; 2174.03,1411.03 cw(c2185.28,1399.79) U1.10@2185.28,1415.69
NetU1_11: U1.11 U2.22 | length 403.5
  Top Layer w15: U2.22@1837.48,1337.56 1837.48,1346.48 v2(1858,1367) ; v2(1962,1370) U1.11@2212.83,1370
  Bottom Layer w15: v2(1858,1367) v2@1958,1367 ; 1946.31,1367 ccw(c1946.31,1385.69) v2@1959.53,1372.47
NetU1_12: U1.12 U2.21 | length 578.2
  Top Layer w15: v2@1799.53,1401.53 cw(c1783.93,1385.93) 1805.98,1385.93 ; v2@1803,1404 v2(1802,1404) 1805.98,1400.02 U2.21@1805.98,1337.56 ; v2(1890,1325) 2207.83,1325 U1.12@2212.83,1320 ; 2162.8,1325 cw(c2162.8,1297.52) U1.12@2182.23,1316.95
  Bottom Layer w15: v2(1802,1404) 1802,1362 1839,1325 v2(1890,1325)
NetU1_13: U1.13 U2.20 | length 523
  Top Layer w15: U2.20@1774.49,1337.56 1774.49,1300.51 1795,1280 2202.83,1280 U1.13@2212.83,1270 ; 2150.73,1280 cw(c2150.73,1235.45) U1.13@2182.23,1266.95
NetU1_14: U1.14 U2.19 | length 1092.8
  Top Layer w15: U2.19@1742.99,1337.56 1742.99,1381.99 v2(1760,1399) ; v1(1975,1055) 2185,1055 2230,1100 2230,1202.83 U1.14@2212.83,1220 ; v1@1982.07,1047.93 cw(c1999.14,1030.86) 1999.14,1055 cw(c1999.14,1079.14) v1@1982.07,1062.07 ; 2230,1184.5 cw(c2275.89,1184.5) U1.14@2243.44,1216.95 ; 2230,1199.93 cw(c2246.73,1199.93) U1.14@2241.69,1215.89
  Bottom Layer w15: v2@1757.53,1396.53 cw(c1746.72,1385.72) 1762,1385.72 ; v2@1762,1399 1762,1352 1829,1285 1908,1285 1942,1251 1942,1088 v1(1975,1055) ; v1@1965,1055 ccw(c1940.86,1055) 1957.93,1072.07 ccw(c1975,1089.14) v1@1975,1065
RESET: C20.2 D1.2 R4.2 S1.1 U2.12 | length 2833.2
  Top Layer w15: S1.1@714,1500 S1.1@994,1500 994,1455 980,1441 980,1283 ; S1.1@733.45,1480.55 cw(c780.39,1433.61) 780.39,1500 cw(c780.39,1566.39) S1.1@733.45,1519.45 ; S1.1@744.05,1469.95 cw(c816.6,1397.4) 816.6,1500 cw(c816.6,1602.6) S1.1@744.05,1530.05 ; R4.2@959.92,1244.31 ccw(c932.68,1283) 980,1283 ; S1.1@963.95,1469.95 ccw(c891.4,1397.4) 891.4,1500 ccw(c891.4,1602.6) S1.1@963.95,1530.05 ; R4.2@965,1230 980,1245 980,1283 ; R4.2@968.56,1232.04 ccw(c953.04,1254.09) R4.2@980,1254.09 ; S1.1@974.55,1480.55 ccw(c927.61,1433.61) 927.61,1500 ccw(c927.61,1566.39) S1.1@974.55,1519.45 ; U2.12@1522.52,1337.56 U2.12@1522,1337.04 ; 1824.77,1165.23 ccw(c1864.88,1205.34) D1.2@1884.52,1152.13 ; 1841.33,1148.67 ccw(c1873.81,1181.14) D1.2@1889.71,1138.06 ; 1857.9,1132.1 ccw(c1882.74,1156.94) D1.2@1894.9,1123.98 ; D1.2@1899.45,1125 1865,1125 1810,1180 1630,1180 1522,1288 U2.12@1522,1337.04 ; 980,1283 1034.56,1337.56 1098.56,1337.56 1116,1355 1320,1355 1360,1315 1499.96,1315 U2.12@1522,1337.04
  Bottom Layer w25: C20.2@917.63,1327.37 ccw(c887.75,1357.25) 930,1357.25 ccw(c972.25,1357.25) C20.2@942.37,1327.37 ; C20.2@930,1315 930,1436 ; S1.1@956.5,1499.99 cw(c866.04,1499.97) 930,1436 ; S1.1@993.99,1462.5 ccw(c993.97,1372.04) 930,1436 ; S1.1@994,1500 930,1436
RS232_R: U3.8 XS1.2 | length 643.7
  Top Layer w23.62: XS1.2@170,756.81 cw(c170,712.9) 201.05,743.95 cw(c232.1,775) XS1.2@188.19,775 ; XS1.2@170,775 250,695 U3.8@630.51,695 ; 394.78,695 cw(c394.78,665.78) v4@415.44,686.44 ; 399.61,695 ccw(c399.61,717.39) v4@415.44,701.56 ; v4@430.56,686.44 cw(c451.22,665.78) 451.22,695 ; v4@430.56,701.56 ccw(c446.39,717.39) 446.39,695
  other v4: 423,694
RS232_T: U3.7 XS1.3 | length 674.4
  Top Layer w23.62: XS1.3@170,956.81 cw(c170,881.51) 223.24,934.76 ; XS1.3@170,975 183,975 413,745 U3.7@630.51,745 ; 354.22,803.78 ccw(c381,830.57) v4@381,792.69 ; v4@391.69,782 ccw(c429.57,782) 402.78,755.22
  other v4: 381,782
RXD: U2.5 U3.9 | length 1728.4
  Top Layer w15: U3.9@819.49,695 U3.9@824.49,690 ; v1(989,1010) 1035,1010 1121,1096 1182,1096 v1@1194,1108 ; v1@996.07,1002.93 cw(c1013.14,985.86) 1013.14,1010 cw(c1013.14,1034.14) v1@996.07,1017.07 ; v1@1209.42,1534.53 ccw(c1196.8,1549) 1216,1549 ; v1@1211,1527 cw(c1252.04,1527) 1223.02,1556.02 ; v1(1216,1527) 1216,1549 ; v1@1222.58,1534.53 cw(c1235.2,1549) 1216,1549 ; v1@1226,1527 cw(c1303.25,1527) 1248.63,1581.63 ; U2.5@1457.56,1591.5 1258.5,1591.5 1216,1549
  Top Layer w20: U3.9@829.49,694 v1(918,694) ; v1@912.7,688.7 ccw(c899.89,675.89) 899.89,694 ccw(c899.89,712.11) v1@912.7,699.3
  Bottom Layer w15: v1(918,694) 944,720 944,965 v1(989,1010) ; v1@918,704 ccw(c918,728.14) 935.07,711.07 ccw(c952.14,694) v1@928,694 ; v1@979,1010 cw(c954.86,1010) 971.93,992.93 cw(c989,975.86) v1@989,1000 ; v1@1204.01,1117.15 ccw(c1187.15,1134.43) 1211.29,1134.14 ccw(c1235.43,1133.85) v1@1218.15,1116.99 ; v1@1208.85,1520.01 cw(c1191.66,1503.23) 1215.68,1502.95 ; v1(1211,1110) v1@1215.96,1526.89 ; 1215.68,1502.77 cw(c1239.94,1502.48) v1@1222.99,1519.85
SCLK: U2.42 U4.6 | length 2184
  Top Layer w15: U4.6@670,2845.51 670,2880 725,2935 1105,2935 v1(1170,2870) ; U4.6@674.31,2877.01 cw(c691.94,2877.01) 679.48,2889.48 ; v1@1160,2870 ccw(c1135.86,2870) 1152.93,2887.07 ccw(c1170,2904.14) v1@1170,2880 ; v1(1230,1900) 1528,1900 1585.51,1842.49 U2.42@1585.51,1782.44 ; v1@1237.07,1892.93 cw(c1254.14,1875.86) 1254.14,1900 cw(c1254.14,1924.14) v1@1237.07,1907.07
  Bottom Layer w15: v1@1162.93,2862.93 cw(c1145.86,2845.86) 1170,2845.86 cw(c1194.14,2845.86) v1@1177.07,2862.93 ; v1(1170,2870) 1170,1960 v1(1230,1900) ; v1@1220,1900 ccw(c1195.86,1900) 1212.93,1917.07 ccw(c1230,1934.14) v1@1230,1910
SET: S6.1 U2.11 | length 4236.1
  Top Layer w15: v1(1457.56,1382.44) U2.11@1457.56,1402.52 ; v1(1552,1045) 1582,1045 ; v1@1559.53,1038.42 cw(c1574,1025.8) 1574,1045 ; v1@1559.53,1051.58 ccw(c1574,1064.2) 1574,1045 ; v1@1685,995 ccw(c1660.86,995) 1677.93,1012.07 ccw(c1695,1029.14) v1@1695,1005 ; v1(1695,995) 1645,1045 1582,1045 ; v1@1800,570 cw(c1800,545.86) 1817.07,562.93 cw(c1834.14,580) v1@1810,580 ; v1(1800,580) 1840,540 2995,540 3030,505 3030,360 S6.1@3156.26,233.74 S6.1@3648.39,233.74 ; S6.1@3113.76,233.74 ccw(c3011.16,233.74) 3083.71,306.29 ccw(c3156.26,378.84) S6.1@3156.26,276.24 ; S6.1@3128.76,233.74 ccw(c3062.37,233.74) 3109.31,280.69 ccw(c3156.26,327.63) S6.1@3156.26,261.24 ; S6.1@3175.71,214.29 cw(c3222.65,167.35) 3222.65,233.74 cw(c3222.65,300.13) S6.1@3175.71,253.19 ; S6.1@3186.31,203.69 cw(c3258.86,131.14) 3258.86,233.74 cw(c3258.86,336.34) S6.1@3186.31,263.79 ; S6.1@3618.33,203.69 ccw(c3545.78,131.14) 3545.78,233.74 ccw(c3545.78,336.34) S6.1@3618.33,263.79 ; S6.1@3628.94,214.29 ccw(c3581.99,167.35) 3581.99,233.74 ccw(c3581.99,300.13) S6.1@3628.94,253.19 ; 1574,1045 1582,1045 ; 1576.14,1045 cw(c1576.14,1069.14) 1559.07,1052.07 ccw(c1576.14,1069.14) 1576.14,1045 ; 1576.14,1045 ccw(c1576.14,1020.86) 1559.07,1037.93 cw(c1576.14,1020.86) 1576.14,1045
  Bottom Layer w15: v1@1457.56,1372.44 cw(c1457.56,1348.3) 1474.63,1365.37 cw(c1491.7,1382.44) v1@1467.56,1382.44 ; v1(1457.56,1382.44) 1523,1317 1523,1074 v1(1552,1045) ; v1@1542,1045 ccw(c1517.86,1045) 1534.93,1062.07 ccw(c1552,1079.14) v1@1552,1055 ; v1@1687.93,987.93 cw(c1670.86,970.86) 1695,970.86 cw(c1719.14,970.86) v1@1702.07,987.93 ; v1(1695,995) 1695,685 v1(1800,580) ; v1@1790,580 ccw(c1765.86,580) 1782.93,597.07 ccw(c1800,614.14) v1@1800,590
SI: U2.43 U4.4 | length 2070
  Top Layer w15: v1@562.93,2802.07 ccw(c545.86,2819.14) 570,2819.14 ccw(c594.14,2819.14) v1@577.07,2802.07 ; v1(570,2795) U4.4@570,2845.51 ; v1@760,1847.5 1528.5,1847.5 1554.02,1821.98 U2.43@1554.02,1782.44 ; v1@767.07,1842.93 cw(c778.11,1831.89) 778.11,1847.5 ; v1@767.07,1857.07 ccw(c790.18,1880.18) 790.18,1847.5
  Bottom Layer w15: v1@562.93,2787.93 cw(c545.86,2770.86) 570,2770.86 cw(c594.14,2770.86) v1@577.07,2787.93 ; v1(570,2795) 570,2040 v1(760,1850) ; v1@750,1850 ccw(c725.86,1850) 742.93,1867.07 ccw(c760,1884.14) v1@760,1860
SO: U4.15 XS2.3 | length 1356
  Top Layer w15: XS2.3@167,2146 362,2341 v4(362,2361) cw(c313.72,2361) 347.86,2326.86 ; XS2.3@167,2168.5 ccw(c167,2222.82) 205.41,2184.41 ccw(c243.82,2146) XS2.3@189.5,2146 ; 322.25,2301.25 ccw(c262.5,2361) v4@347,2361 ; v7@464.7,2980.3 ccw(c451.89,2993.11) 470,2993.11 ccw(c488.11,2993.11) v7@475.3,2980.3 ; v7(470,2975) U4.15@470,3034.49
  Bottom Layer w15: v4@351.39,2371.61 ccw(c325.79,2397.21) 362,2397.21 ccw(c398.21,2397.21) v4@372.61,2371.61 ; v4(362,2361) 362,2933 404,2975 v7(470,2975) ; v7@464.7,2969.7 ccw(c451.89,2956.89) 451.89,2975 ccw(c451.89,2993.11) v7@464.7,2980.3
SO_CPLD: R21.1 U2.2 U4.14 | length 2768.6
  Top Layer w15: U4.14@520,3034.49 520,3080 555,3115 1055,3115 v1(1115,3055) ; U4.14@524.31,3065.98 cw(c568.56,3065.98) 537.27,3097.27 ; v1@1105,3055 ccw(c1080.86,3055) 1097.93,3072.07 ccw(c1115,3089.14) v1@1115,3065 ; v1@1115,2050 cw(c1115,2025.86) 1132.07,2042.93 cw(c1149.14,2060) v1@1125,2060 ; v1(1115,2060) 1200,1975 R21.1@1225,1975 ; 1155.98,2019.02 ccw(c1220,2083.03) R21.1@1220,1992.5 ; 1181.59,1993.41 ccw(c1220,2031.82) R21.1@1220,1977.5 ; v1(1390,1690) 1394.02,1685.98 U2.2@1457.56,1685.98
  Bottom Layer w15: v1@1107.93,2052.93 cw(c1090.86,2035.86) 1115,2035.86 cw(c1139.14,2035.86) v1@1122.07,2052.93 ; v1@1107.93,2067.07 ccw(c1090.86,2084.14) 1115,2084.14 ccw(c1139.14,2084.14) v1@1122.07,2067.07 ; v1@1107.93,3047.93 cw(c1090.86,3030.86) 1115,3030.86 cw(c1139.14,3030.86) v1@1122.07,3047.93 ; v1(1115,3055) v1(1115,2060) 1115,1932 1357,1690 v1(1390,1690) ; v1@1382.93,1682.93 ccw(c1365.86,1665.86) 1365.86,1690 ccw(c1365.86,1714.14) v1@1382.93,1697.07
STOP: S7.1 U2.10 | length 3675.7
  Top Layer w15: v1@1362.93,1384.07 ccw(c1345.86,1401.14) 1370,1401.14 ccw(c1394.14,1401.14) v1@1377.07,1384.07 ; v1(1370,1377) 1370,1405 1399.02,1434.02 U2.10@1457.56,1434.02 ; v1(1442,1142) 1711,1142 1803,1050 1903,1050 v1(1931,1022) ; v1@1449.07,1134.93 cw(c1466.14,1117.86) 1466.14,1142 cw(c1466.14,1166.14) v1@1449.07,1149.07 ; v1@1921,1022 ccw(c1896.86,1022) 1913.93,1039.07 ccw(c1931,1056.14) v1@1931,1032 ; S7.1@2416.26,233.74 S7.1@2908.39,233.74 ; S7.1@2435.71,214.29 cw(c2482.65,167.35) 2482.65,233.74 cw(c2482.65,300.13) S7.1@2435.71,253.19 ; S7.1@2446.31,203.69 cw(c2518.86,131.14) 2518.86,233.74 cw(c2518.86,336.34) S7.1@2446.31,263.79 ; S7.1@2878.33,203.69 ccw(c2805.78,131.14) 2805.78,233.74 ccw(c2805.78,336.34) S7.1@2878.33,263.79 ; S7.1@2888.94,214.29 ccw(c2841.99,167.35) 2841.99,233.74 ccw(c2841.99,300.13) S7.1@2888.94,253.19
  Bottom Layer w15: v1@1362.93,1369.93 cw(c1345.86,1352.86) 1370,1352.86 cw(c1394.14,1352.86) v1@1377.07,1369.93 ; v1(1370,1377) 1370,1198 1426,1142 v1(1442,1142) ; 1397.62,1170.38 ccw(c1442,1214.77) v1@1442,1152 ; 1423.22,1144.78 ccw(c1442,1163.56) v1@1442,1137 ; v1@1923.93,1014.93 cw(c1906.86,997.86) 1931,997.86 cw(c1955.14,997.86) v1@1938.07,1014.93 ; v1(1931,1022) 1931,815 2120,626 2120,549 2039,468 2039,388 2088,339 2311,339 S7.1@2416.26,233.74 ; S7.1@2373.76,233.74 ccw(c2271.16,233.74) 2343.71,306.29 ccw(c2416.26,378.84) S7.1@2416.26,276.24 ; S7.1@2388.76,233.74 ccw(c2322.37,233.74) 2369.31,280.69 ccw(c2416.26,327.63) S7.1@2416.26,261.24
TXD: U2.3 U3.10 | length 1976.1
  Top Layer w15: 939,764 1564,764 v1(1580,780) ; U2.3@1457.56,1654.49 1555.51,1654.49 1606,1604 v1(1611,1604) 1611,1614 cw(c1611,1650.21) 1585.39,1624.61 ; 1517.23,764 ccw(c1517.23,842.77) v1@1572.93,787.07 ; 1553.44,764 ccw(c1553.44,806.56) v1@1583.54,776.46
  Top Layer w20: U3.10@819.49,745 920,745 939,764
  Bottom Layer w15: v1(1580,780) 1614,814 1614,1467 v1@1614,1594 ; v1@1580,790 ccw(c1580,814.14) 1597.07,797.07 ccw(c1614.14,780) v1@1590,780 ; v1@1603.93,1596.93 cw(c1579.62,1572.62) 1614,1572.62
UP: S3.1 U2.35 | length 3614.9
  Top Layer w15: U2.35@1805.98,1782.44 1805.98,1915.98 1895,2005 3626,2005 3833,2212 S3.1@3833,2225 ; 3760.76,2139.76 ccw(c3661.78,2238.74) S3.1@3801.76,2238.74 ; 3786.37,2165.37 ccw(c3713,2238.74) S3.1@3816.76,2238.74 ; 3798.13,2177.13 cw(c3844.26,2131.01) S3.1@3844.26,2196.24 ; 3811.97,2190.97 ccw(c3764.21,2238.74) S3.1@3831.76,2238.74
  Bottom Layer w15: S3.1@3844.26,2238.74 S3.1@4336.39,2238.74 ; S3.1@3863.71,2219.29 cw(c3910.65,2172.35) 3910.65,2238.74 cw(c3910.65,2305.13) S3.1@3863.71,2258.19 ; S3.1@3874.31,2208.69 cw(c3946.86,2136.14) 3946.86,2238.74 cw(c3946.86,2341.34) S3.1@3874.31,2268.79 ; S3.1@4306.33,2208.69 ccw(c4233.78,2136.14) 4233.78,2238.74 ccw(c4233.78,2341.34) S3.1@4306.33,2268.79 ; S3.1@4316.94,2219.29 ccw(c4269.99,2172.35) 4269.99,2238.74 ccw(c4269.99,2305.13) S3.1@4316.94,2258.19
pads on no net: CON1.6 CON1.7 CON1.8 S5.1@3856.26,233.74 U1.18 U1.21 U1.22 U2.13 U2.14 U2.38 U2.39 U2.40 U3.12 U3.14 U4.9 U4.10 U4.11 U4.12 U4.13 U4.16 U5.1
copper on no net:
  other v5: 151,159 4555,163 4553,2980 155,2994

## Polygon pours and split planes (outlines as drawn)
GND on Top Layer "Top Layer-No Net" (hatched 90Degree grid 20 track 10, remove dead copper): 406,3095 4095,3095 4405,2785 4652,2538 4652,1570 4652,547 4248,143 4188,83 518,83 518,90 185,423 137,471 65,471 65,2617 80,2632 406,2958 406,3095
GND on Bottom Layer "Top Layer-No Net" (hatched 90Degree grid 20 track 10, remove dead copper): 424,3091 4110,3091 4648,2553 4648,534 4648,533 4280,165 4221,106 479,106 479,121 161,439 151,449 51,449 51,2673 71,2693 150,2772 345,2772 345,3012 424,3091

## Keep-outs
Keep-Out Layer:
  lines w10: -5,0.39 -5,3150 ; 0,0 4724.41,0 ; 0.59,3145 4725,3145 ; 4725,5.39 4725,3155

## Silkscreen, mask and mechanical layers (free items; w line width, h text height)
Top Overlay:
  circle w10: c155,2994 r136.5
  circle w10: c4554,2980 r136.5
  circle w10: c4556,163 r136.5
  circle w10: c152,159 r136.5
  text "Display1.0  SDU" at 3801,2695 h60

## Text inside footprints (layer, text, board x,y; h text height)
CON1: Top Overlay "10" at 1055,850 h30; Top Overlay "9" at 1065,975 h30; Top Overlay "1" at 1640,989 h30; Top Overlay "2" at 1633,859 h30